# Altium PCB MiniRobot.PcbDoc
Units mm, origin at the board's own origin, x right, y up, seen from the top; angles counter-clockwise.
Board outline 90 x 85 mm, 2 copper layers (Top Layer, Bottom Layer); 51 components, 46 nets, 191 pads, 652 vias.
Unrouted connection lines stored in the file: 23.
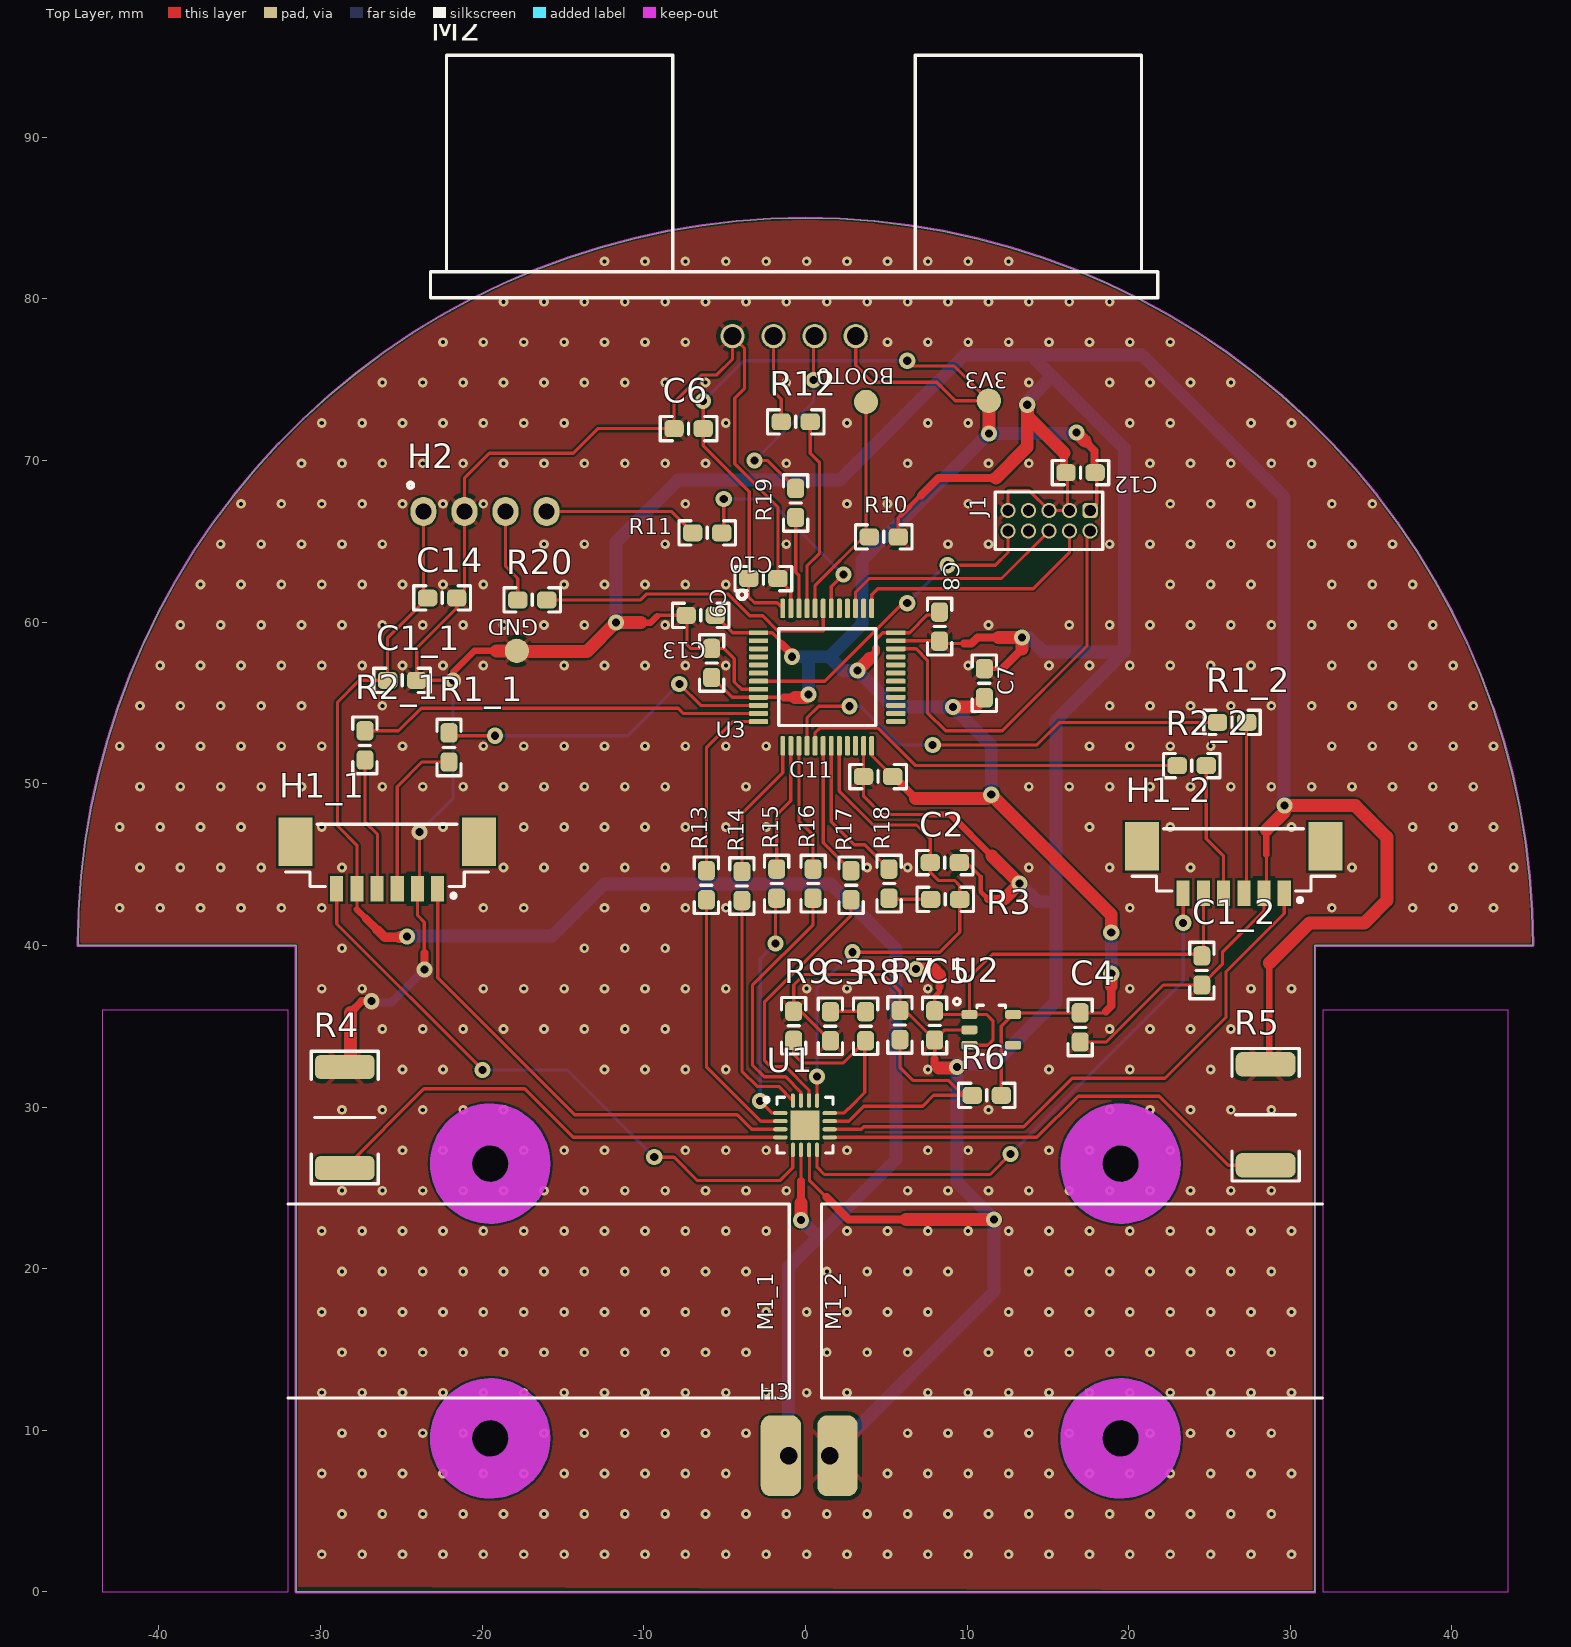
[diagram p0: Top Layer view]
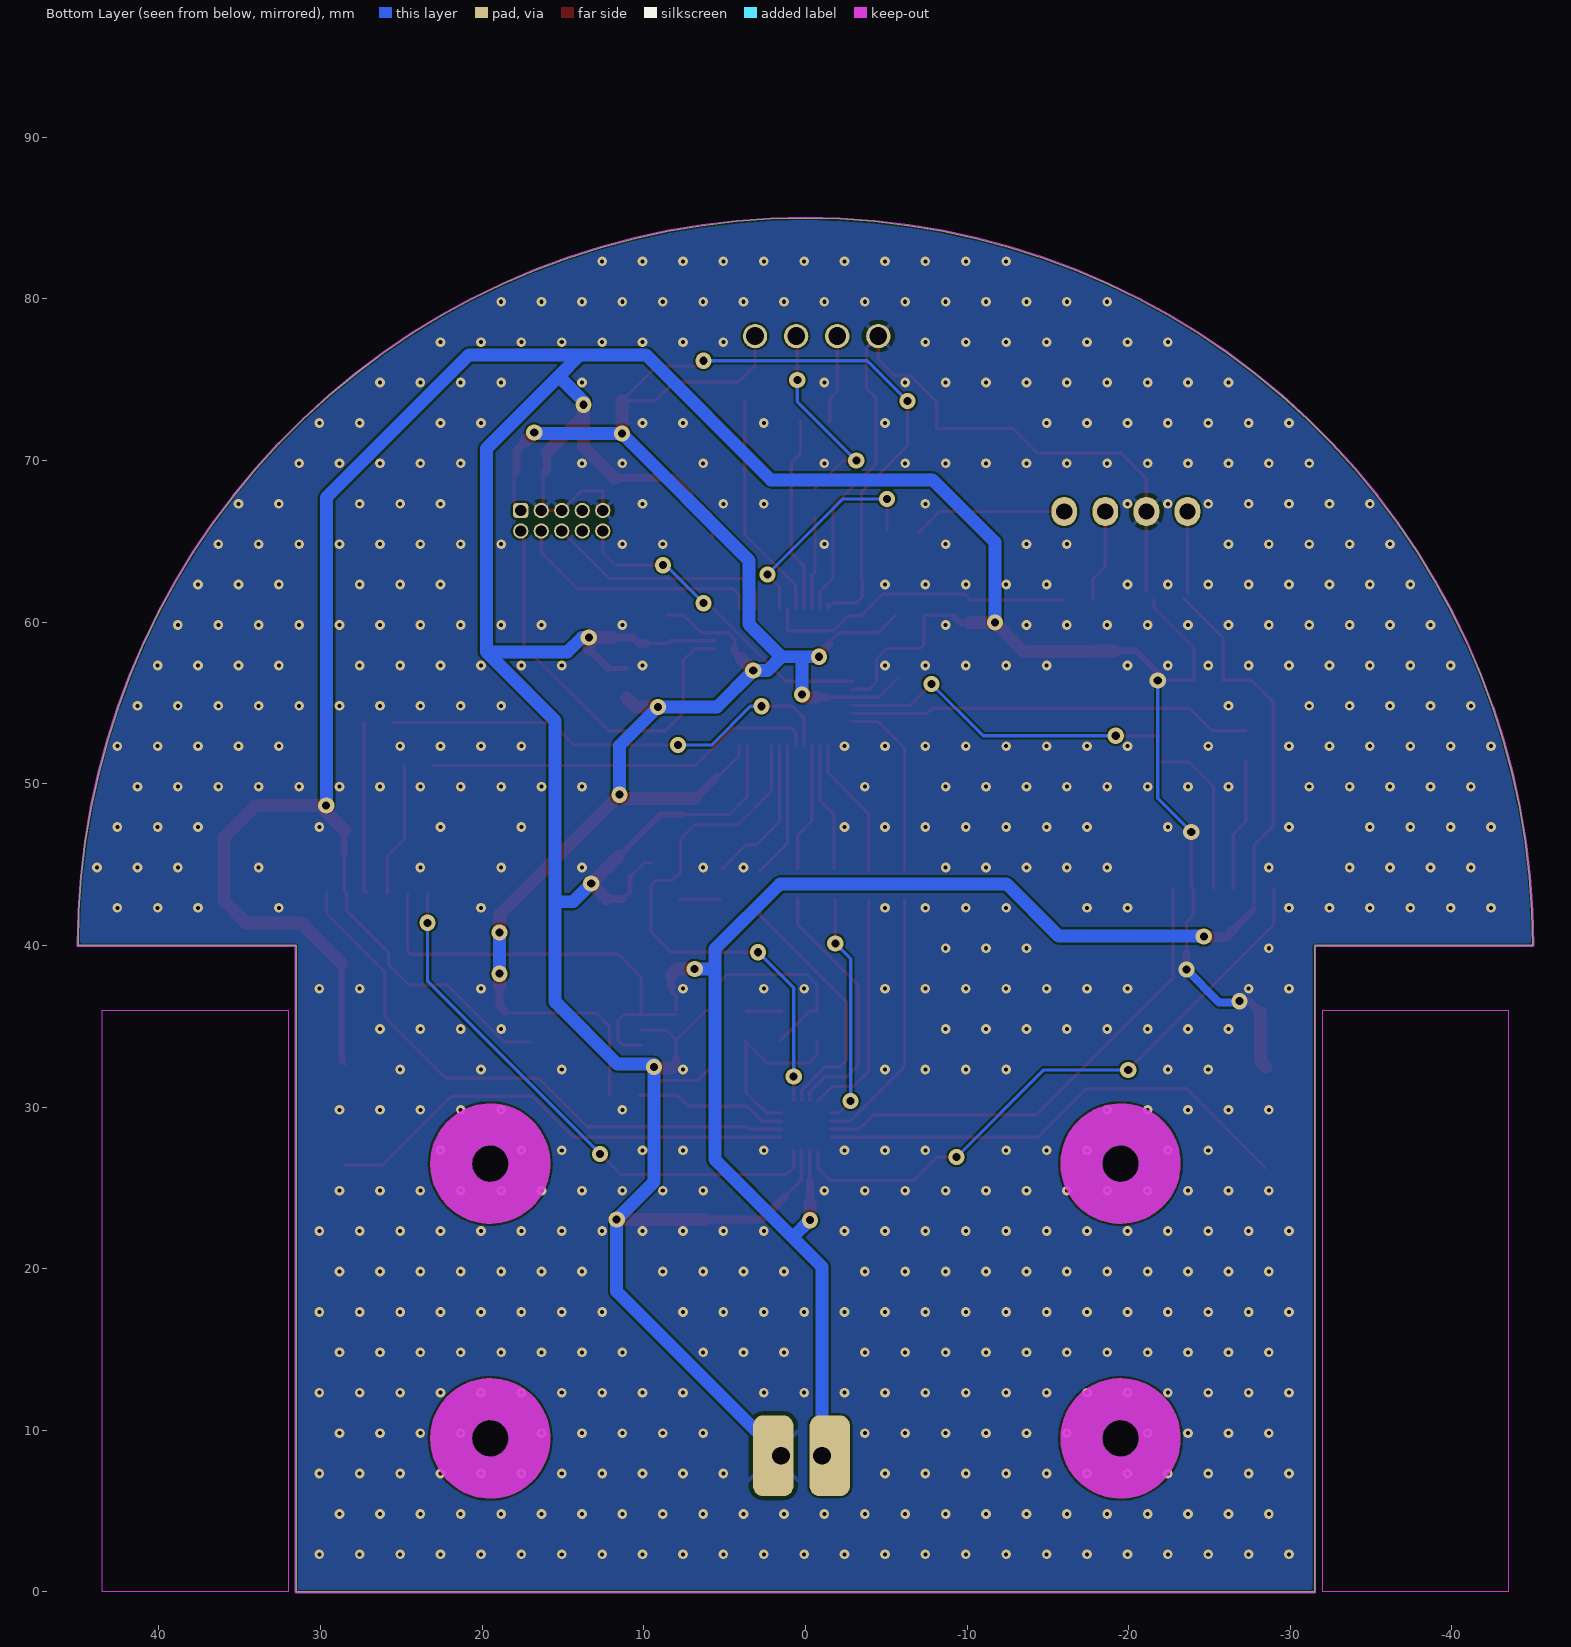
[diagram p1: Bottom Layer view, seen from below]

## Layer stack, top to bottom
Top Solder: solder mask 0.0102, Solder Resist, Dk 3.5
Top Layer: signal copper 0.0356
Dielectric 1: dielectric 0.32, FR-4, Dk 4.8
Bottom Layer: signal copper 0.0356
Bottom Solder: solder mask 0.0102, Solder Resist, Dk 3.5

## Board outline
45,40 44.949,42.141 44.796,44.278 44.542,46.404 44.187,48.516 43.732,50.609 43.177,52.678 42.525,54.718 41.777,56.725 40.933,58.694 39.998,60.62 38.971,62.5 37.856,64.329 36.656,66.103 35.372,67.817 34.009,69.469 32.568,71.054 31.054,72.568 29.469,74.009 27.817,75.372 26.103,76.656 24.329,77.856 22.5,78.971 20.62,79.998 18.694,80.933 16.725,81.777 14.718,82.525 12.678,83.177 10.609,83.732 8.516,84.187 6.404,84.542 4.278,84.796 2.141,84.949 0,85 -2.141,84.949 -4.278,84.796 -6.404,84.542 -8.516,84.187 -10.609,83.732 -12.678,83.177 -14.718,82.525 -16.725,81.777 -18.694,80.933 -20.62,79.998 -22.5,78.971 -24.329,77.856 -26.103,76.656 -27.817,75.372 -29.469,74.009 -31.054,72.568 -32.568,71.054 -34.009,69.469 -35.372,67.817 -36.656,66.103 -37.856,64.329 -38.971,62.5 -39.998,60.62 -40.933,58.694 -41.777,56.725 -42.525,54.718 -43.177,52.678 -43.732,50.609 -44.187,48.516 -44.542,46.404 -44.796,44.278 -44.949,42.141 -45,40 -31.5,40 -31.5,0 31.5,0 31.5,40

## Design rules (kind name [scope] priority, off if disabled: settings)
Clearance [All] p1: gap=0.125
ComponentClearance [All] p1 off: gap=0.254 collisioncheckmode=3 verticalgap=0.254 showdistances=FALSE
HoleSize [All] p1: absolutevalues=TRUE maxlimit=10 minlimit=0.19 maxpercent=80.000 minpercent=20.000
MinimumAnnularRing [All] p1: minimumring=0.076
MinimumSolderMaskSliver [All] p1: minsoldermaskwidth=0.154
PolygonConnect via_connect [IsVia] p1: connectstyle=Direct reliefconductorwidth=0.254 reliefentries=4 polygonreliefangle="90 Angle" airgapwidth=0.254
PolygonConnect [All] p2: connectstyle=Relief reliefconductorwidth=0.254 reliefentries=4 polygonreliefangle="45 Angle" airgapwidth=0.254
RoutingVias [All] p1: holewidth=0.25 width=0.6 viastyle="Through Hole" minholewidth=0.2 minwidth=0.45 maxholewidth=1 maxwidth=2
SilkToSilkClearance [All] p1: silktosilkclearance=0.154
SilkToSolderMaskClearance [IsPad] p1: minsilkscreentomaskgap=0 clearancetoexposedcopper=TRUE
SolderMaskExpansion SolderMask_Via [IsVia] p1: expansion=-100
SolderMaskExpansion [All] p2: expansion=0.102
Width [All] p1: maxlimit=10 minlimit=0.075 preferedwidth=0.2 minimp=50.000000 maximp=50.000000 favimp=50.000000
24 further rules are at their usual default settings.

## Classes and differential pairs
component class U_MR_UartConnector: C14 H2 R20
component class U_MR_RangeSensor: C6 M2 R12
component class U_MR_Motor_Control: C2 C3 R3 R4 R5 R6 R7 R8 R9 U1
component class U_MR_Mcu: 3V3 BOOT0 C7 C8 C9 C10 C11 C12 C13 GND J1 R10 R11 R13 R14 R15 R16 R17 R18 R19 U3
component class LeftMotor: C1_1 H1_1 M1_1 R1_1 R2_1
component class RightMotor: C1_2 H1_2 M1_2 R1_2 R2_2
component class U_MR_Power: C4 C5 H3 U2
channel class MR_Motor: LeftMotor RightMotor

## Components (designator, comment, footprint, x,y, rotation, side; value= is the part's Value field where it differs from the comment)
3V3 "TestPoint" ROUND_TEST_POINT 11.35,73.7 r270 top
BOOT0 "TestPoint" ROUND_TEST_POINT 3.75,73.625 r0 top
C1_1 "CerCap" 0603_CAP_LD -24.95,56.4 r180 top (schematic designator C1)
C1_2 "CerCap" 0603_CAP_LD 24.525,38.45 r90 top (schematic designator C1)
C2 "CerCap" 0603_CAP_LD 8.625,45.125 r180 top
C3 "CerCap" 0603_CAP_LD 1.55,35 r90 top
C4 "CerCap" 0603_CAP_LD 17,34.925 r90 top
C5 "CerCap" 0603_CAP_LD 8,35.05 r90 top
C6 "CerCap" 0603_CAP_LD -7.225,71.975 r0 top
C7 "CerCap" 0603_CAP_LD 11.075,56.225 r270 top
C8 "CerCap" 0603_CAP_LD 8.3,59.725 r90 top
C9 "CerCap" 0603_CAP_LD -5.8,57.475 r270 top
C10 "CerCap" 0603_CAP_LD -2.6,62.7 r180 top
C11 "CerCap" 0603_CAP_LD 4.5,50.45 r0 top
C12 "CerCap" 0603_CAP_LD 17.025,69.25 r0 top
C13 "CerCap" 0603_CAP_LD -6.475,60.425 r0 top
C14 "CerCap" 0603_CAP_LD -22.475,61.5 r180 top
GND "TestPoint" ROUND_TEST_POINT -17.85,58.225 r180 top
H1_1 "Header" HEADER_1X6_PICOBLADE_653106124022 -25.875,45.575 r180 top (schematic designator H1)
H1_2 "Header" HEADER_1X6_PICOBLADE_653106124022 26.5,45.3 r180 top (schematic designator H1)
H2 "Header" "HE14 1X4 STRAIGHT" -19.825,66.85 r0 top
H3 "CustomBatteryConnector" CUSTOMBATTERYCONNECTOR 0.238,8.423 r0 top
J1 "Debug" 62201021121 15.075,66.275 r180 top
M1_1 "MotorGroup" MOTORGROUP -1,18 r0 top locked (schematic designator M1)
M1_2 "MotorGroup" MOTORGROUP 1,18 r180 top locked (schematic designator M1)
M2 "Ultrasonic Range Sensor" HC-SR04 -0.7,77.7 r0 top
R1_1 "Resistor" 0603_RES_LD -22.05,52.25 r270 top (schematic designator R1)
R1_2 "Resistor" 0603_RES_LD 26.4,53.8 r0 top (schematic designator R1)
R2_1 "Resistor" 0603_RES_LD -27.25,52.375 r270 top (schematic designator R2)
R2_2 "Resistor" 0603_RES_LD 23.9,51.125 r0 top (schematic designator R2)
R3 "Resistor" 0603_RES_LD 8.65,42.85 r0 top
R4 "Resistor" 2512_RES_LD -28.5,29.35 r270 top
R5 "Resistor" 2512_RES_LD 28.475,29.525 r270 top
R6 "Resistor" 0603_RES_LD 11.225,30.725 r180 top
R7 "Resistor" 0603_RES_LD 5.85,35.075 r90 top
R8 "Resistor" 0603_RES_LD 3.725,35 r270 top
R9 "Resistor" 0603_RES_LD -0.725,35.025 r270 top
R10 "Resistor" 0603_RES_LD 4.85,65.275 r180 top
R11 "Resistor" 0603_RES_LD -6.075,65.525 r0 top
R12 "Resistor" 0603_RES_LD -0.6,72.4 r180 top
R13 "Resistor" 0603_RES_LD -6.125,43.725 r90 top
R14 "Resistor" 0603_RES_LD -3.925,43.675 r90 top
R15 "Resistor" 0603_RES_LD -1.775,43.825 r90 top
R16 "Resistor" 0603_RES_LD 0.475,43.825 r90 top
R17 "Resistor" 0603_RES_LD 2.825,43.725 r90 top
R18 "Resistor" 0603_RES_LD 5.175,43.825 r90 top
R19 "Resistor" 0603_RES_LD -0.6,67.375 r270 top
R20 "Resistor" 0603_RES_LD -16.9,61.375 r180 top
U1 "Dual Brush Motor Driver" QFN-STSPIN240 -0.025,28.875 r0 top
U2 "Low noise, Low Iq LDO" LP5907 11.5,34.775 r0 top
U3 "Microcontroller" STM32_LQFP48 1.35,56.6 r0 top

## Footprints (in the part's own frame and the unit in brackets; to place one, negate y for a bottom-side part, rotate by r counter-clockwise, add the part's x,y. Pads: shape width x height; smd on the part's side, far side on the other; paste and mask are expansions set on the pad)
0603_CAP_LD [mm] "0603 Capacitor Low Density"
  rrect50% 1.2x1.05 smd: 1(-0.9,0) 2(0.9,0)
  silkscreen extent -1.75,-0.75 1.75,0.75
0603_RES_LD [mm] "0603 Resistor Low Density"
  rrect50% 1.2x1.05 smd: 1(-0.9,0) 2(0.9,0)
  silkscreen extent -1.75,-0.75 1.75,0.75
2512_RES_LD [mm] "2512 Low Density Resistor"
  rrect50% 1.5x3.7 smd: 1(-3.125,0) 2(3.125,0)
  silkscreen extent -4.1,-2.07 4.1,2.07
62201021121 [mm] "Pin Header, pitch 1.27 mm, THT, Vertical, dual row, 10p"
  rrect50% 0.95x0.95 hole 0.7: 1(-2.54,-0.635)
  round 0.95 hole 0.7: 2(-2.54,0.635) 3(-1.27,-0.635) 4(-1.27,0.635) 5(0,-0.635) 6(0,0.635) 7(1.27,-0.635) 8(1.27,0.635) 9(2.54,-0.635) 10(2.54,0.635)
  silkscreen extent -3.32,-1.78 3.32,1.78, body extent -3.17,-1.7 3.18,1.7, height 5.33
CUSTOMBATTERYCONNECTOR [mm] "CustomBatteryConnector"
  rrect50% 2.5x5 smd paste-100: +(-1.75,0) -(1.75,0)
  rrect50% 2.5x5 smd far side paste-100: +(-1.75,0) -(1.75,0)
  round 1.5 hole 1.1 unplated paste-100: +(-1.27,0) -(1.27,0)
HC-SR04 [mm] "HC-SR04"
  round 1.5 hole 1.1 unplated: 1(-3.81,0) 2(-1.27,0) 3(1.27,0) 4(3.81,0)
  silkscreen extent -22.5,2.38 22.5,17.38, body extent -22.72,-0.3 22.72,17.49, height 20
"HE14 1X4 STRAIGHT" [mm] "Connector HE14 Straight 1x4"
  oval 1.6x1.8 hole 1 mask+0.102: 1(-3.81,0) 2(-1.27,0) 3(1.27,0) 4(3.81,0)
  silkscreen extent -4.77,1.47 -4.45,1.78, body extent -5.08,-1.27 5.08,1.27, height 9.5
HEADER_1X6_PICOBLADE_653106124022 [mm] "1.25mm SMT Male Vertical Shrouded Header, 6p"
  rect 0.81x1.6 smd: 1(-3.125,2.07) 2(-1.875,2.07) 3(-0.625,2.07) 4(0.625,2.07) 5(1.875,2.07) 6(3.125,2.07)
  rect 2.1x3 smd: ""(-5.675,-0.83) ""(5.675,-0.83)
  silkscreen extent -6.27,-1.92 6.27,2.62
LP5907 [mm] "LP5907 SOT23"
  rrect50% 1x0.55 smd mask+0.102: 1(-1.35,0.95) 2(-1.35,0) 3(-1.35,-0.95) 4(1.35,-0.95) 5(1.35,0.95)
  silkscreen extent -2.33,-1.52 0.88,1.95
MOTORGROUP [mm]
  round 0 hole 2.2 unplated paste+0 mask+0: 21(-18.5,8.5) 22(-18.5,-8.5)
  Keep-Out Layer circle w2.6: c-18.5,8.5 r2.425
  Keep-Out Layer circle w2.6: c-18.5,-8.5 r2.425
  Keep-Out Layer region: -31,-18 -31,18 -42.5,18 -42.5,-18
  silkscreen extent -31,-6 0,6
QFN-STSPIN240 [mm] "QFN, 16-Leads, Body 3,00x3,00mm, Pitch 0,50mm, Thermal Pad 1,80x1,80mm, IPC Low Density"
  oval 0.9x0.25 smd: 1(-1.525,0.75) 2(-1.525,0.25) 3(-1.525,-0.25) 4(-1.525,-0.75) 9(1.525,-0.75) 10(1.525,-0.25) 11(1.525,0.25) 12(1.525,0.75)
  oval 0.25x0.9 smd: 5(-0.75,-1.525) 6(-0.25,-1.525) 7(0.25,-1.525) 8(0.75,-1.525) 13(0.75,1.525) 14(0.25,1.525) 15(-0.25,1.525) 16(-0.75,1.525)
  rect 1.8x1.8 smd: 7(0,0)
  silkscreen extent -2.5,-1.73 1.73,1.73
ROUND_TEST_POINT [mm] "Small round test point"
  round 1.5 smd paste-100: 1(0,0)
STM32_LQFP48 [mm]
  rrect50% 1.2x0.3 smd: 1(-4.25,2.75) 2(-4.25,2.25) 3(-4.25,1.75) 4(-4.25,1.25) 5(-4.25,0.75) 6(-4.25,0.25) 7(-4.25,-0.25) 8(-4.25,-0.75) 9(-4.25,-1.25) 10(-4.25,-1.75) 11(-4.25,-2.25) 12(-4.25,-2.75) 25(4.25,-2.75) 26(4.25,-2.25) 27(4.25,-1.75) 28(4.25,-1.25) 29(4.25,-0.75) 30(4.25,-0.25) 31(4.25,0.25) 32(4.25,0.75) 33(4.25,1.25) 34(4.25,1.75) 35(4.25,2.25) 36(4.25,2.75)
  rrect50% 0.3x1.2 smd: 13(-2.75,-4.25) 14(-2.25,-4.25) 15(-1.75,-4.25) 16(-1.25,-4.25) 17(-0.75,-4.25) 18(-0.25,-4.25) 19(0.25,-4.25) 20(0.75,-4.25) 21(1.25,-4.25) 22(1.75,-4.25) 23(2.25,-4.25) 24(2.75,-4.25) 37(2.75,4.25) 38(2.25,4.25) 39(1.75,4.25) 40(1.25,4.25) 41(0.75,4.25) 42(0.25,4.25) 43(-0.25,4.25) 44(-0.75,4.25) 45(-1.25,4.25) 46(-1.75,4.25) 47(-2.25,4.25) 48(-2.75,4.25)
  silkscreen extent -5.54,-3 3,5.37

## Part data
C1_1 C1_2 C2 C3 C4 C5 C6 C7 C8 C9 C10 C11 C12 C13 C14: "Ceramic Capacitor"
H1_1 H1_2: library part Header_6x1, "Header 6x1 Pins"
H2: library part Header_4x1, "Header 4x1 PIns"
H3: library part BatteryConnector, "Custom Battery Connector"
J1: library part Cortex_10x2, "Cortex 10 pins Debug Connector"
M1_1 M1_2: library part Motor
M2: library part HC-SR04
U1: library part STSPIN240, "ST Dual Motor Driver"
U2: library part LP5907, "LP5907 Low Noise Low Iq LDO"
U3: library part STM32F303CBT6, "STM32F303 Microcontroller"

## Via types
v1: diameter 0.6, hole 0.25, Top Layer to Bottom Layer, 609 vias
v2: diameter 1, hole 0.5, Top Layer to Bottom Layer, 43 vias

## Nets (pads, with @x,y where several pads share a name; then routed paths per layer and width w, separated by ;. In a path a pad name is that pad's centre, name@x,y a point inside that pad or via, vN(x,y) a via of type N, cw(c..) or ccw(c..) an arc to the next point about the centre after c; other vN are vias at no path point)
3V3: 3V3.1 C4.2 C6.2 C7.2 C8.2 C9.2 C10.2 C11.2 C12.2 C13.2 J1.1 M2.4 R6.1 U2.5 U3.1 U3.9 U3.24 U3.36 U3.48 | length 155.8
  Top Layer w0.2: v2(-6.325,73.675) C6.2 -6.325,70.925 -3.475,68.075 -3.475,62.725 C10.2 -3.525,62.675 -3.525,61.575 -3.15,61.2 -1.75,61.2 U3.48 U3.48@-1.4,61.175 ; C9.2@-5.75,56.575 -4.525,55.35 U3.9 -1.325,55.35 ; C13.2 -4.5,59.35 U3.1 -2.06,59.35 -1.475,58.765 -1.475,58.65 ; M2.4 3.11,75.89 4.15,74.85 8.125,74.85 9.275,73.7 3V3.1 9.2,75.85 6.625,75.85 v2(6.3,76.175) ; U3.24 4.1,51.75 C11.2 C11.2@5.475,50.45 ; 4.375,58.375 4.375,58.95 4.775,59.35 U3.36 6.45,59.35 7.55,60.45 C8.2@8.6,60.45 ; R6.1 12.125,35 U2.5 ; U2.5@12.95,35.825 C4.2 18.5,35.825 18.6,35.925 ; J1.1 18.025,67.32 C12.2@18.025,69.35
  Top Layer w0.5: -1.475,58.65 v2@-0.837,58.013 ; -1.325,55.35 -0.65,55.35 ; 3.975,57.75 4.375,58.15 4.375,58.375 ; C11.2@5.475,50.45 6.825,49.1 ; 17.3,71.2 17.875,70.625 17.875,69.3 C12.2 ; 18.6,35.925 18.925,36.25 18.925,37.5
  Top Layer w0.8: v2(-0.837,57.863) v2@-0.837,58.013 ; -0.65,55.35 0.025,55.35 v2(0.2,55.525) ; v2(3.225,57) 3.975,57.75 ; 6.825,49.1 v2@11.275,49.1 ; v2(9.125,54.75) 10.5,54.75 C7.2 ; v2(11.35,71.675) 3V3.1 ; v2(11.5,49.325) 18.925,41.9 v2(18.925,40.8) ; v2(16.775,71.725) 17.3,71.2 ; 18.925,37.5 v2(18.925,38.25)
  Bottom Layer w0.2: v2(-6.325,73.675) -3.825,76.175 v2(6.3,76.175)
  Bottom Layer w0.8: v2(-0.837,57.863) 0.45,57.863 ; v2(0.2,55.525) 0.2,57.613 0.45,57.863 ; v2(11.5,49.325) 11.5,52.375 v2(9.125,54.75) 5.475,54.75 v2(3.225,57) 2.35,57 1.488,57.863 ; v2(16.775,71.725) 16.725,71.675 v2(11.35,71.675) 3.5,63.825 3.5,59.875 1.488,57.863 ; v2@18.925,38.625 v2(18.925,40.8) ; 0.45,57.863 1.488,57.863
BOOT0: BOOT0.1 R10.2 U3.44 | length 14.1
  Top Layer w0.2: U3.44 0.6,62.275 3.75,65.425 BOOT0.1
GND: C1_1.1 C1_2.1 C2.1 C3.1 C4.1 C5.1 C6.1 C7.1 C8.1 C9.1 C10.1 C11.1 C12.1 C13.1 C14.1 GND.1 H1_1.2 H1_2.2 H2.2 H3.- J1.3 J1.5 J1.9 M2.1 R4.1 R5.1 R7.2 R9.1 R10.1 U1.7 U2.2 U3.8 U3.23 U3.35 U3.47 | length 417.9
  Top Layer w0.2: H1_1.2 -24,41.865 -23.575,41.44 -23.575,39.525 ; H1_1.2@-23.875,43.63 v2(-23.875,47.025) ; v2(-21.8,56.4) C1_1.1 -24.05,58.4 -21.575,60.875 C14.1 ; C14.1@-21.095,61.98 H2.2 -21.095,68.905 -19.55,70.45 -14.375,70.45 -12.85,71.975 C6.1 -8.125,73.6 -6.425,75.3 -5.475,75.3 -4.51,76.265 M2.1 -3.775,76.965 -3.775,74.45 -4.375,73.85 -4.375,69.8 -1.7,67.125 C10.1 -0.9,61.9 U3.47 ; -9.175,60.375 -9.125,60.425 C13.1 ; C13.1@-7.325,60.375 -7.325,58.6 -7.1,58.375 C9.1 -5.05,58.375 -4.4,57.725 -4.4,56.3 -3.95,55.85 U3.8 ; U1.7@0.225,27.35 0.25,27.325 0.25,25.475 1.3,24.425 ; C3.1 -0.275,35.925 R9.1 -0.725,37.55 -0.075,38.2 4.825,38.2 5.85,37.175 R7.2 6.175,35.975 C5.1 ; U3.23 C11.1 3.6,49.225 4.725,48.1 7.675,48.1 ; U3.35 C8.1@8.4,58.85 ; R10.1 5.75,66.45 5.9,66.6 ; 8,32.975 C5.1 ; C8.1 8.45,58.675 9.825,58.675 ; C2.1 9.975,45.125 10.85,44.25 ; U2.2 8.625,34.775 C5.1 ; J1.9 12.535,68.135 13.85,68.135 J1.5 J1.3 ; J1.3@16.225,67.03 C12.1@16.225,69.35 ; C4.1 18.625,34.025 22.15,37.55 C1_2.1 25.8,38.825 25.8,39.575 28.375,42.15 H1_2.2 28.525,43.38 28.525,45.6 ; R5.1 R5.1@28.7,32.875
  Top Layer w0.3: 5.9,66.6 7.15,67.85 ; 10.85,44.25 10.85,43.325 11.3,42.875 ; C7.1 12.175,57.125 12.25,57.2
  Top Layer w0.4: v2@-21.8,56.9 -20.475,58.225 -19.125,58.225 ; -10.175,59.975 -9.575,59.975 -9.175,60.375 ; 7.675,48.1 8.975,48.1 11.55,45.525 ; 28.525,45.6 28.525,47.15 ; R5.1@28.7,32.875 28.7,38.9
  Top Layer w0.5: -28.15,35.85 -27.45,36.55 v2(-26.85,36.55) ; v2(-23.575,38.5) -23.575,39.525 ; 1.3,24.425 2.675,23.05 6.225,23.05 ; 7.15,67.85 8.225,68.925 11.8,68.925 ; 8,32.975 8,32.675 8.25,32.425 ; 9.825,58.675 10.275,58.675 10.65,59.05 11.95,59.05 ; 11.3,42.875 12.3,42.875 ; 12.25,57.2 13.4,58.35 ; 16,70.475 16,69.375 C12.1
  Top Layer w0.8: R4.1 -28.15,32.825 -28.15,35.85 ; -19.125,58.225 GND.1 ; GND.1@-17.475,58.175 -13.525,58.175 v2(-11.725,59.975) -10.175,59.975 ; 6.225,23.05 v2(11.675,23.05) ; 8.25,32.425 9.325,32.425 v2(9.375,32.475) ; 11.55,45.525 v2(13.25,43.825) 12.3,42.875 ; 11.8,68.925 13.725,70.85 v2(13.725,73.45) 13.75,73.425 13.75,72.725 16,70.475 ; 11.95,59.05 v2(13.4,59.05) 13.4,58.35 ; 28.525,47.15 29.65,48.275 v2(29.65,48.65) 34.025,48.65 35.975,46.7 35.975,42.775 34.6,41.4 31.2,41.4 28.7,38.9
  Bottom Layer w0.2: v2(-23.875,47.025) -21.8,49.1 v2(-21.8,56.4)
  Bottom Layer w0.5: v2(-26.85,36.55) -26.775,36.475 -25.6,36.475 v2(-23.575,38.5)
  Bottom Layer w0.8: v2(-11.725,59.975) -11.725,64.95 -7.875,68.8 2.125,68.8 9.85,76.525 13.95,76.525 ; H3.-@1.508,8.423 11.675,18.59 v2(11.675,23.05) 9.375,25.35 v2(9.375,32.475) 9.375,32.65 11.625,32.65 15.45,36.475 ; v2(13.25,43.825) 14.375,42.7 15.5,42.7 ; v2(13.4,59.05) 13.825,59.05 14.712,58.162 19.737,58.162 ; v2(13.725,73.45) 13.725,73.675 15.262,75.213 ; 15.5,36.525 15.5,42.7 ; v2@29.625,48.65 29.625,67.725 20.825,76.525 13.95,76.525 ; 13.95,76.525 15.262,75.213 ; 15.262,75.213 19.737,70.738 19.737,58.162 ; 15.5,42.7 15.5,53.925 19.737,58.162
  other v1: -29.925,2.325 -27.425,2.325 -24.925,2.325 -22.425,2.325 -19.925,2.325 -17.425,2.325 -14.925,2.325 -12.425,2.325 -9.925,2.325 -7.425,2.325 -4.925,2.325 -2.425,2.325 0.075,2.325 2.575,2.325 5.075,2.325 7.575,2.325 10.075,2.325 12.575,2.325 15.075,2.325 17.575,2.325 20.075,2.325 22.575,2.325 25.075,2.325 27.575,2.325 30.075,2.325 -28.675,4.825 -26.175,4.825 -23.675,4.825 -21.175,4.825 -18.675,4.825 -16.175,4.825 -13.675,4.825 -11.175,4.825 -8.675,4.825 -6.175,4.825 -3.675,4.825 -1.175,4.825 1.325,4.825 3.825,4.825 6.325,4.825 8.825,4.825 11.325,4.825 13.825,4.825 16.325,4.825 18.825,4.825 21.325,4.825 23.825,4.825 26.325,4.825 28.825,4.825 -29.925,7.325 -27.425,7.325 -24.925,7.325 -22.425,7.325 -19.925,7.325 -17.425,7.325 -14.925,7.325 -12.425,7.325 -9.925,7.325 -7.425,7.325 -4.925,7.325 5.075,7.325 7.575,7.325 10.075,7.325 12.575,7.325 15.075,7.325 17.575,7.325 20.075,7.325 22.575,7.325 25.075,7.325 27.575,7.325 30.075,7.325 -28.675,9.825 -26.175,9.825 -23.675,9.825 -21.175,9.825 -16.175,9.825 -13.675,9.825 -11.175,9.825 -8.675,9.825 -6.175,9.825 -3.675,9.825 6.325,9.825 8.825,9.825 11.325,9.825 13.825,9.825 16.325,9.825 21.325,9.825 23.825,9.825 26.325,9.825 28.825,9.825 -29.925,12.325 -27.425,12.325 -24.925,12.325 -22.425,12.325 -19.925,12.325 -17.425,12.325 -14.925,12.325 -12.425,12.325 -9.925,12.325 -7.425,12.325 -4.925,12.325 -2.425,12.325 0.075,12.325 2.575,12.325 7.575,12.325 10.075,12.325 12.575,12.325 15.075,12.325 17.575,12.325 20.075,12.325 22.575,12.325 25.075,12.325 27.575,12.325 30.075,12.325 -28.675,14.825 -26.175,14.825 -23.675,14.825 -21.175,14.825 -18.675,14.825 -16.175,14.825 -13.675,14.825 -11.175,14.825 -8.675,14.825 -6.175,14.825 -3.675,14.825 1.325,14.825 3.825,14.825 6.325,14.825 11.325,14.825 13.825,14.825 16.325,14.825 18.825,14.825 21.325,14.825 23.825,14.825 26.325,14.825 28.825,14.825 -29.925,17.325 -27.425,17.325 -24.925,17.325 -22.425,17.325 -19.925,17.325 -17.425,17.325 -14.925,17.325 -12.425,17.325 -9.925,17.325 -7.425,17.325 -4.925,17.325 -2.425,17.325 0.075,17.325 2.575,17.325 5.075,17.325 7.575,17.325 12.575,17.325 15.075,17.325 17.575,17.325 20.075,17.325 22.575,17.325 25.075,17.325 27.575,17.325 30.075,17.325 -28.675,19.825 -26.175,19.825 -23.675,19.825 -21.175,19.825 -18.675,19.825 -16.175,19.825 -13.675,19.825 -11.175,19.825 -8.675,19.825 -6.175,19.825 -3.675,19.825 1.325,19.825 3.825,19.825 6.325,19.825 8.825,19.825 13.825,19.825 16.325,19.825 18.825,19.825 21.325,19.825 23.825,19.825 26.325,19.825 28.825,19.825 -29.925,22.325 -27.425,22.325 -24.925,22.325 -22.425,22.325 -19.925,22.325 -17.425,22.325 -14.925,22.325 -12.425,22.325 -9.925,22.325 -7.425,22.325 -4.925,22.325 -2.425,22.325 2.575,22.325 5.075,22.325 7.575,22.325 10.075,22.325 12.575,22.325 15.075,22.325 17.575,22.325 20.075,22.325 22.575,22.325 25.075,22.325 27.575,22.325 30.075,22.325 -28.675,24.825 -26.175,24.825 -23.675,24.825 -21.175,24.825 -18.675,24.825 -16.175,24.825 -13.675,24.825 -11.175,24.825 -8.675,24.825 -6.175,24.825 -3.675,24.825 -1.175,24.825 6.325,24.825 8.825,24.825 11.325,24.825 13.825,24.825 16.325,24.825 18.825,24.825 21.325,24.825 23.825,24.825 26.325,24.825 28.825,24.825 -24.925,27.325 -22.425,27.325 -17.425,27.325 -14.925,27.325 -12.425,27.325 -7.425,27.325 -4.925,27.325 -2.425,27.325 2.575,27.325 7.575,27.325 10.075,27.325 15.075,27.325 17.575,27.325 22.575,27.325 -28.675,29.825 -26.175,29.825 -23.675,29.825 -21.175,29.825 -18.675,29.825 11.325,29.825 18.825,29.825 21.325,29.825 23.825,29.825 26.325,29.825 28.825,29.825 -24.925,32.325 -22.425,32.325 -12.425,32.325 -9.925,32.325 -7.425,32.325 -4.925,32.325 7.575,32.325 15.075,32.325 20.075,32.325 25.075,32.325 -26.175,34.825 -23.675,34.825 -21.175,34.825 -18.675,34.825 -16.175,34.825 -13.675,34.825 -11.175,34.825 -8.675,34.825 18.825,34.825 21.325,34.825 23.825,34.825 26.325,34.825 -29.925,37.325 -27.425,37.325 -19.925,37.325 -17.425,37.325 -14.925,37.325 -12.425,37.325 -9.925,37.325 -7.425,37.325 -4.925,37.325 0.075,37.325 2.575,37.325 7.575,37.325 20.075,37.325 27.575,37.325 30.075,37.325 -28.675,39.825 -13.675,39.825 -11.175,39.825 -8.675,39.825 -42.425,42.325 -39.925,42.325 -37.425,42.325 -34.925,42.325 -32.425,42.325 -29.925,42.325 -19.925,42.325 -17.425,42.325 -12.425,42.325 -9.925,42.325 -7.425,42.325 -4.925,42.325 20.075,42.325 32.575,42.325 37.575,42.325 40.075,42.325 42.575,42.325 -41.175,44.825 -38.675,44.825 -36.175,44.825 -33.675,44.825 -28.675,44.825 -18.675,44.825 -16.175,44.825 -13.675,44.825 -11.175,44.825 -8.675,44.825 3.825,44.825 6.325,44.825 13.825,44.825 18.825,44.825 23.825,44.825 33.825,44.825 38.825,44.825 41.325,44.825 43.825,44.825 -42.425,47.325 -39.925,47.325 -37.425,47.325 -34.925,47.325 -29.925,47.325 -22.425,47.325 -17.425,47.325 -14.925,47.325 -12.425,47.325 -9.925,47.325 -7.425,47.325 -4.925,47.325 -2.425,47.325 17.575,47.325 22.575,47.325 30.075,47.325 37.575,47.325 40.075,47.325 42.575,47.325 -41.175,49.825 -38.675,49.825 -36.175,49.825 -33.675,49.825 -31.175,49.825 -26.175,49.825 -23.675,49.825 -21.175,49.825 -18.675,49.825 -16.175,49.825 -13.675,49.825 -11.175,49.825 -8.675,49.825 -3.675,49.825 13.825,49.825 16.325,49.825 18.825,49.825 21.325,49.825 23.825,49.825 26.325,49.825 28.825,49.825 31.325,49.825 33.825,49.825 36.325,49.825 38.825,49.825 41.325,49.825 -42.425,52.325 -39.925,52.325 -37.425,52.325 -34.925,52.325 -32.425,52.325 -29.925,52.325 -24.925,52.325 -19.925,52.325 -17.425,52.325 -14.925,52.325 -12.425,52.325 -9.925,52.325 -7.425,52.325 -4.925,52.325 -2.425,52.325 17.575,52.325 20.075,52.325 22.575,52.325 25.075,52.325 32.575,52.325 35.075,52.325 37.575,52.325 40.075,52.325 42.575,52.325 -41.175,54.825 -38.675,54.825 -36.175,54.825 -33.675,54.825 -31.175,54.825 -26.175,54.825 18.825,54.825 21.325,54.825 23.825,54.825 26.325,54.825 28.825,54.825 31.325,54.825 33.825,54.825 36.325,54.825 38.825,54.825 41.325,54.825 -39.925,57.325 -37.425,57.325 -34.925,57.325 -32.425,57.325 -29.925,57.325 -27.425,57.325 -24.925,57.325 -22.425,57.325 -19.925,57.325 -14.925,57.325 -12.425,57.325 -9.925,57.325 -7.425,57.325 -4.925,57.325 10.075,57.325 15.075,57.325 17.575,57.325 20.075,57.325 22.575,57.325 25.075,57.325 27.575,57.325 32.575,57.325 35.075,57.325 37.575,57.325 40.075,57.325 -38.675,59.825 -36.175,59.825 -33.675,59.825 -31.175,59.825 -28.675,59.825 -26.175,59.825 -23.675,59.825 -21.175,59.825 -18.675,59.825 -16.175,59.825 -13.675,59.825 -8.675,59.825 11.325,59.825 16.325,59.825 18.825,59.825 21.325,59.825 23.825,59.825 26.325,59.825 28.825,59.825 31.325,59.825 33.825,59.825 36.325,59.825 38.825,59.825 -37.425,62.325 -34.925,62.325 -32.425,62.325 -29.925,62.325 -27.425,62.325 -24.925,62.325 -22.425,62.325 -19.925,62.325 -14.925,62.325 -12.425,62.325 -9.925,62.325 -7.425,62.325 -4.925,62.325 22.575,62.325 25.075,62.325 27.575,62.325 32.575,62.325 35.075,62.325 37.575,62.325 -36.175,64.825 -33.675,64.825 -31.175,64.825 -28.675,64.825 -26.175,64.825 -16.175,64.825 -13.675,64.825 -8.675,64.825 -1.175,64.825 8.825,64.825 11.325,64.825 18.825,64.825 21.325,64.825 23.825,64.825 26.325,64.825 28.825,64.825 31.325,64.825 33.825,64.825 36.325,64.825 -34.925,67.325 -32.425,67.325 -29.925,67.325 -27.425,67.325 -24.925,67.325 -22.425,67.325 -19.925,67.325 -7.425,67.325 2.575,67.325 5.075,67.325 10.075,67.325 22.575,67.325 25.075,67.325 27.575,67.325 32.575,67.325 35.075,67.325 -31.175,69.825 -28.675,69.825 -26.175,69.825 -23.675,69.825 -21.175,69.825 -18.675,69.825 -16.175,69.825 -13.675,69.825 -11.175,69.825 -8.675,69.825 -6.175,69.825 -1.175,69.825 6.325,69.825 11.325,69.825 13.825,69.825 21.325,69.825 23.825,69.825 26.325,69.825 28.825,69.825 31.325,69.825 -29.925,72.325 -27.425,72.325 -24.925,72.325 -22.425,72.325 -19.925,72.325 -17.425,72.325 -14.925,72.325 -4.925,72.325 2.575,72.325 7.575,72.325 10.075,72.325 20.075,72.325 22.575,72.325 27.575,72.325 30.075,72.325 -26.175,74.825 -23.675,74.825 -21.175,74.825 -18.675,74.825 -16.175,74.825 -13.675,74.825 -11.175,74.825 -8.675,74.825 -6.175,74.825 -1.175,74.825 13.825,74.825 18.825,74.825 21.325,74.825 23.825,74.825 26.325,74.825 -22.425,77.325 -19.925,77.325 -17.425,77.325 -14.925,77.325 -12.425,77.325 -9.925,77.325 -7.425,77.325 5.075,77.325 7.575,77.325 10.075,77.325 12.575,77.325 15.075,77.325 17.575,77.325 20.075,77.325 22.575,77.325 -18.675,79.825 -16.175,79.825 -13.675,79.825 -11.175,79.825 -8.675,79.825 -6.175,79.825 -3.675,79.825 -1.175,79.825 1.325,79.825 3.825,79.825 6.325,79.825 8.825,79.825 11.325,79.825 13.825,79.825 16.325,79.825 18.825,79.825 -12.425,82.325 -9.925,82.325 -7.425,82.325 -4.925,82.325 -2.425,82.325 0.075,82.325 2.575,82.325 5.075,82.325 7.575,82.325 10.075,82.325 12.575,82.325
NetC2_2: C2.2 R3.2 U1.13 U3.20 | length 34
  Top Layer w0.2: U1.13 v2(0.725,31.9) ; U3.20 2.1,49.55 4.2,47.45 6.875,47.45 7.725,46.6 C2.2 7.725,44.525 8.225,44.025 9.225,44.025 9.55,43.7 R3.2 9.55,40.825 8.3,39.575 v2(2.925,39.575)
  Bottom Layer w0.2: v2(0.725,31.9) 0.725,37.375 v2(2.925,39.575)
NetC3_2: C3.2 R8.1 | length 2.2
  Top Layer w0.2: C3.2@1.45,35.925 R8.1@3.675,35.925
NetH1_1_1: H1_1.1 U1.3 | length 30.6
  Top Layer w0.2: H1_1.1 -22.75,38 -14.275,29.525 -4.225,29.525 -3.325,28.625 U1.3
NetH1_1_3: H1_1.3 R1_1.2 | length 10.2
  Top Layer w0.2: H1_1.3 -25.25,49.825 -23.725,51.35 R1_1.2
NetH1_1_4: H1_1.4 R2_1.2 | length 8.3
  Top Layer w0.2: R2_1.2 -27.25,47.65 -26.475,46.875 H1_1.4@-26.475,43.53
NetH1_1_6: H1_1.6 U1.5 | length 38.4
  Top Layer w0.2: H1_1.6 -29,41.325 v2(-19.975,32.3) ; v2(-9.35,26.9) -8.125,26.9 -6.675,25.45 -1.575,25.45 -0.775,26.25 U1.5
  Bottom Layer w0.2: v2(-19.975,32.3) -14.75,32.3 v2(-9.35,26.9)
NetH1_2_1: H1_2.1 U1.10 | length 36.6
  Top Layer w0.2: U1.10 3.45,28.625 3.6,28.775 13.5,28.775 16.5,31.775 22.25,31.775 26.025,35.55 26.025,38.375 29.625,41.975 H1_2.1
NetH1_2_3: H1_2.3 R1_2.2 | length 10.6
  Top Layer w0.2: H1_2.3 27.3,43.405 R1_2.2
NetH1_2_4: H1_2.4 R2_2.2 | length 8.3
  Top Layer w0.2: R2_2.2 24.8,46.6 25.875,45.525 H1_2.4
NetH1_2_6: H1_2.6 U1.8 | length 34.3
  Top Layer w0.2: U1.8 0.725,26.275 1.175,25.825 11.425,25.825 v2(12.7,27.1) ; v2(23.375,41.4) H1_2.6
  Bottom Layer w0.2: v2(12.7,27.1) 23.375,37.775 v2(23.375,41.4)
NetH2_3: H2.3 R20.2 | length 5.8
  Top Layer w0.2: H2.3 -18.555,63.455 -17.8,62.7 R20.2
NetH2_4: H2.4 R11.1 | length 9.6
  Top Layer w0.2: H2.4 -8.3,66.85 R11.1
NetM2_2: M2.2 R12.2 | length 5.5
  Top Layer w0.2: M2.2 -1.97,74.27 -1.5,73.8 R12.2
NetM2_3: M2.3 R19.1 | length 12.5
  Top Layer w0.2: v2(-3.15,70) -2.325,70 R19.1 ; v2(0.5,74.975) 0.5,77.63 M2.3
  Bottom Layer w0.2: v2(-3.15,70) 0.5,73.65 v2(0.5,74.975)
NetR1_1_1: R1_1.1 U3.10 | length 20.8
  Top Layer w0.2: R1_1.1@-21.875,52.975 v2(-19.2,52.975) ; v2(-7.8,56.175) -6.475,54.85 U3.10
  Bottom Layer w0.2: v2(-19.2,52.975) -11,52.975 v2(-7.8,56.175)
NetR1_2_1: R1_2.1 U3.16 | length 29
  Top Layer w0.2: U3.16 0.1,54.075 0.825,54.8 v2(2.725,54.8) ; v2(7.875,52.4) 14.325,52.4 15.725,53.8 R1_2.1
  Bottom Layer w0.2: v2(2.725,54.8) 3.4,54.8 5.8,52.4 v2(7.875,52.4)
NetR2_1_1: R2_1.1 U3.11 | length 25.1
  Top Layer w0.2: R2_1.1 -25.175,53.275 -23.775,54.675 -7.875,54.675 -7.55,54.35 U3.11
NetR2_2_1: R2_2.1 U3.17 | length 24.3
  Top Layer w0.2: U3.17 0.6,53.175 0.875,53.45 4.5,53.45 6.825,51.125 R2_2.1
NetR3_1: R3.1 R18.1 | length 2.5
  Top Layer w0.2: R18.1@5.25,42.85 R3.1
NetR4_2: R4.2 U1.4 | length 30.2
  Top Layer w0.2: R4.2 -23.6,31.125 -17.375,31.125 -14.375,28.125 U1.4
NetR5_2: R5.2 U1.9 | length 29.8
  Top Layer w0.2: U1.9 14.325,28.125 16.875,30.675 21.9,30.675 26.175,26.4 R5.2
NetR6_2: R6.2 R7.1 U1.11 | length 15.9
  Top Layer w0.2: U1.11 2.675,29.125 3.6,30.05 7.25,30.05 7.925,30.725 R6.2@9.775,30.725 ; R7.1 5.85,32.45 6.65,31.65 8.85,31.65 R6.2@9.775,30.725 ; R6.2 R6.2@9.775,30.725
NetR8_2: R8.2 R9.2 U1.12 | length 12
  Top Layer w0.2: R9.2 -0.725,33.25 -0.2,32.725 2.35,32.725 R8.2@3.675,34.05 ; U1.12 2.365,29.625 2.64,29.9 2.675,29.9 3.675,30.9 R8.2@3.675,34.05 ; R8.2 R8.2@3.675,34.05
NetR11_2: R11.2 U3.42 | length 13.7
  Top Layer w0.2: R11.2@-5.05,65.65 v2(-5.05,67.625) ; U3.42 1.6,62.2 v2(2.35,62.95)
  Bottom Layer w0.2: v2(-5.05,67.625) -2.325,67.625 v2(2.35,62.95)
NetR12_1: R12.1 U3.45 | length 12.1
  Top Layer w0.2: U3.45 0.1,63.5 0.875,64.275 0.875,69.875 0.3,70.45 R12.1
NetR13_1: R13.1 U1.2 | length 16.3
  Top Layer w0.2: R13.1 -6.125,32.5 -2.75,29.125 U1.2
NetR13_2: R13.2 U3.12 | length 11.5
  Top Layer w0.2: R13.2 -6.125,52.225 -4.5,53.85 U3.12
NetR14_1: R14.1 U1.16 | length 14.5
  Top Layer w0.2: R14.1 -3.925,32.225 -2.975,31.275 -1.65,31.275 U1.16
NetR14_2: R14.2 U3.13 | length 8.8
  Top Layer w0.2: R14.2 -3.925,48.15 -1.4,50.675 U3.13
NetR15_1: R15.1 U1.1 | length 14.4
  Top Layer w0.2: v2(-2.8,30.375) -2.05,29.625 U1.1 ; v2(-1.85,40.125) R15.1@-1.85,42.85
  Bottom Layer w0.2: v2(-2.8,30.375) -2.8,39.175 v2(-1.85,40.125)
NetR15_2: R15.2 U3.14 | length 8
  Top Layer w0.2: R15.2 -1.775,48.075 -0.9,48.95 U3.14
NetR16_1: R16.1 U1.15 | length 16.1
  Top Layer w0.2: U1.15 -0.275,30.925 -1.225,31.875 -2.55,31.875 -3.275,32.6 -3.275,37.525 0.475,41.275 R16.1
NetR16_2: R16.2 U3.15 | length 8
  Top Layer w0.2: U3.15 -0.4,47.7 0.475,46.825 R16.2
NetR17_1: R17.1 U1.14 | length 16.3
  Top Layer w0.2: U1.14 0.225,31.05 -1.225,32.5 -2.15,32.5 -2.525,32.875 -2.525,36.525 2.825,41.875 R17.1
NetR17_2: R17.2 U3.18 | length 8.4
  Top Layer w0.2: U3.18 1.1,46.35 R17.2
NetR18_2: R18.2 U3.19 | length 9.5
  Top Layer w0.2: U3.19 1.6,47.65 3.025,46.225 3.675,46.225 R18.2
NetR19_2: R19.2 U3.46 | length 5.8
  Top Layer w0.2: R19.2@-0.525,66.4 R19.2 -0.6,63.1 -0.4,62.9 U3.46
NetR20_1: R20.1 U3.43 | length 19.6
  Top Layer w0.2: R20.1 -10.2,61.375 -9.825,61.75 -4.8,61.75 -3.45,60.4 -2.65,60.4 -1.725,59.475 1.1,59.475 U3.43
nRST: J1.10 U3.7 | length 20.1
  Top Layer w0.2: U3.7 1.2,56.35 6.025,61.175 v2(6.3,61.175) ; v2(8.8,63.525) 11.75,63.525 12.535,64.31 J1.10
  Bottom Layer w0.2: v2(6.3,61.175) 8.65,63.525 v2(8.8,63.525)
SWCLK: J1.4 U3.37 | length 15.5
  Top Layer w0.2: U3.37 4.1,61.7 4.475,62.075 14.1,62.075 16.345,64.32 J1.4
SWDIO: J1.2 U3.34 | length 25.2
  Top Layer w0.2: U3.34 6.85,58.35 7.55,57.65 7.55,54.4 8.675,53.275 12.175,53.275 17.425,58.525 17.425,65.45 J1.2
SWO: J1.6 U3.39 | length 14.5
  Top Layer w0.2: U3.39 3.1,61.85 3.95,62.7 12.135,62.7 J1.6
VBATT: C1_1.2 C1_2.2 C5.2 C14.2 H1_1.5 H1_2.5 H2.1 H3.+ U1.6 U2.1 U2.3 | length 138
  Top Layer w0.2: -27.75,42.225 H1_1.5 -27.75,46.2 -28.95,47.4 -28.95,55.05 -27.6,56.4 C1_1.2 -25.85,59.025 C14.2 ; C14.2@-23.635,61.76 H2.1 ; -0.275,25.425 U1.6 ; 7.975,36.825 8,36.8 C5.2 ; C5.2@8,35.725 U2.1 ; U2.3 11.3,33.825 11.6,34.125 11.6,35.35 11.225,35.725 U2.1 ; H1_2.5 24.625,39.65 24.425,39.45 11.575,39.45 10.15,38.025 U2.1
  Top Layer w0.3: 7.975,36.825 8.3,37.15 8.3,37.425
  Top Layer w0.4: -27.75,42.225 -27.175,41.65
  Top Layer w0.5: -27.175,41.65 -26.5,40.975 ; -0.275,24.05 -0.275,25.425 ; 8.3,37.425 8.3,38.175
  Top Layer w0.6: -26.5,40.975 -26.025,40.5 v2@-25.125,40.5
  Top Layer w0.7: v2@-25.125,40.5 -25.075,40.55 v2(-24.65,40.55)
  Top Layer w0.8: v2(-0.275,23) -0.275,24.05 ; v2(6.85,38.55) 7.925,38.55 8.3,38.175
  Bottom Layer w0.8: v2@-24.625,40.575 -15.675,40.575 -12.45,43.8 1.575,43.8 5.6,39.775 5.6,38.55 ; H3.+@-1.032,8.423 -1.032,20.118 5.6,26.75 5.6,38.55 ; v2(-0.275,23) 0.763,21.962 ; v2(6.85,38.55) 5.6,38.55
pads on no net: H1_1. H1_2. J1.7 J1.8 M1_1.21 M1_1.22 M1_2.21 M1_2.22 U2.4 U3.2 U3.3 U3.4 U3.5 U3.6 U3.21 U3.22 U3.25 U3.26 U3.27 U3.28 U3.29 U3.30 U3.31 U3.32 U3.33 U3.38 U3.40 U3.41

## Polygon pours and split planes (outlines as drawn)
GND on Bottom Layer "Top Layer-No Net" (solid, remove dead copper, pour order 4): -53.75,84.975 50.425,84.975 50.6,84.8 49.975,84.175 49.975,38.6 33.4,38.6 33.125,38.875 33.65,38.35 33.65,-1.975 -32.8,-1.975 -33.15,-1.625 -33.7,-1.075 -33.7,38.325 -54.75,38.325 -54.925,38.15
GND on Top Layer "Top Layer-No Net" (solid, remove dead copper, pour order 6): -31.825,0.325 -31.725,0.425 -31.725,39.675 -45.825,39.675 -46,39.5 -45.825,39.675 -45.825,85.775 45.7,85.775 46.225,85.25 46.325,85.15 46.325,39.5 32.4,39.5 31.875,38.975 31.875,0.075

## Keep-outs
Keep-Out Layer:
  lines w0.1: 44.999,42.141 ccw(c44.949,42.141) 44.999,42.142 ; -45.05,40.001 ccw(c-45,40) -45,39.95 ; -45.05,40.002 ccw(c-45,40) -45,39.95 ; -45.05,40.002 -44.999,42.142 ; -45.05,40.001 -45.05,40.002 ; -45,39.95 -31.55,39.95 -31.55,0 ; -44.999,42.142 cw(c-44.949,42.141) -44.999,42.145 ; -44.999,42.142 cw(c-44.949,42.141) -44.999,42.145 ; -44.999,42.142 -44.999,42.142 ; -44.999,42.145 -44.846,44.281 ; -44.846,44.281 cw(c-44.796,44.278) -44.846,44.283 ; -44.846,44.281 cw(c-44.796,44.278) -44.846,44.283 ; -44.846,44.283 -44.592,46.41 ; -44.592,46.41 cw(c-44.542,46.404) -44.591,46.413 ; -44.592,46.41 cw(c-44.542,46.404) -44.591,46.412 ; -44.591,46.413 -44.236,48.524 ; -44.591,46.412 -44.591,46.413 ; -44.236,48.525 cw(c-44.187,48.516) -44.236,48.527 ; -44.236,48.524 cw(c-44.187,48.516) -44.236,48.527 ; -44.236,48.524 -44.236,48.525 ; -44.236,48.527 ccw(c-44.187,48.516) -44.236,48.527 ; -44.236,48.527 -43.78,50.62 ; -44.236,48.527 -44.236,48.527 ; -44.236,48.527 -44.236,48.527 ; -43.78,50.62 cw(c-43.732,50.609) -43.78,50.622 ; -43.78,50.62 ccw(c-43.732,50.609) -43.78,50.62 ; -43.78,50.62 cw(c-43.732,50.609) -43.78,50.622 ; -43.78,50.62 -43.78,50.62 ; -43.78,50.62 -43.78,50.62 ; -43.78,50.622 ccw(c-43.732,50.609) -43.78,50.622 ; -43.78,50.622 -43.226,52.691 ; -43.78,50.622 -43.78,50.622 ; -43.78,50.622 -43.78,50.622 ; -43.226,52.691 cw(c-43.177,52.678) -43.225,52.693 ; -43.226,52.691 ccw(c-43.177,52.678) -43.226,52.691 ; -43.226,52.691 cw(c-43.177,52.678) -43.225,52.693 ; -43.226,52.691 -43.226,52.691 ; -43.226,52.691 -43.226,52.691 ; -43.225,52.693 -42.573,54.733 ; -42.573,54.733 cw(c-42.525,54.718) -42.572,54.735 ; -42.573,54.733 cw(c-42.525,54.718) -42.572,54.736 ; -42.572,54.736 ccw(c-42.525,54.718) -42.572,54.735 ; -42.572,54.736 -41.824,56.742 ; -42.572,54.736 -42.572,54.736 ; -42.572,54.735 -42.572,54.736 ; -41.823,56.742 cw(c-41.777,56.725) -41.823,56.744 ; -41.823,56.742 ccw(c-41.777,56.725) -41.823,56.742 ; -41.823,56.742 cw(c-41.777,56.725) -41.823,56.744 ; -41.823,56.742 -41.823,56.742 ; -41.824,56.742 -41.823,56.742 ; -41.823,56.744 -40.979,58.713 ; -40.979,58.713 cw(c-40.933,58.694) -40.979,58.715 ; -40.979,58.713 cw(c-40.933,58.694) -40.978,58.716 ; -40.979,58.715 cw(c-40.933,58.694) -40.978,58.716 ; -40.979,58.715 -40.978,58.716 ; -40.978,58.716 -40.043,60.642 ; -40.978,58.716 -40.978,58.716 ; -40.043,60.642 cw(c-39.998,60.62) -40.042,60.644 ; -40.043,60.642 cw(c-39.998,60.62) -40.043,60.642 ; -40.043,60.642 -40.043,60.642 ; -40.043,60.642 -40.043,60.642 ; -40.043,60.642 cw(c-39.998,60.62) -40.042,60.644 ; -40.042,60.644 -39.015,62.524 ; -39.015,62.524 cw(c-38.971,62.5) -39.014,62.526 ; -39.015,62.524 cw(c-38.971,62.5) -39.014,62.526 ; -39.014,62.526 -37.899,64.355 ; -37.899,64.355 cw(c-37.856,64.329) -37.898,64.357 ; -37.899,64.355 cw(c-37.856,64.329) -37.898,64.357 ; -37.898,64.357 -36.698,66.13 ; -37.898,64.357 -37.898,64.357 ; -36.697,66.131 cw(c-36.656,66.103) -36.696,66.133 ; -36.698,66.13 cw(c-36.656,66.103) -36.696,66.133 ; -36.698,66.13 -36.697,66.131 ; -36.696,66.133 -35.412,67.847 ; -35.412,67.847 cw(c-35.372,67.817) -35.411,67.849 ; -35.412,67.847 cw(c-35.372,67.817) -35.411,67.849 ; -35.411,67.849 -34.047,69.501 ; -34.047,69.501 cw(c-34.009,69.469) -34.046,69.502 ; -34.047,69.501 cw(c-34.009,69.469) -34.046,69.502 ; -34.046,69.503 ccw(c-34.009,69.469) -34.046,69.502 ; -34.046,69.503 -32.605,71.087 ; -34.046,69.502 -34.046,69.503 ; -34.046,69.502 -34.046,69.502 ; -32.605,71.087 cw(c-32.568,71.054) -32.603,71.089 ; -32.605,71.087 ccw(c-32.568,71.054) -32.605,71.087 ; -32.605,71.087 cw(c-32.568,71.054) -32.603,71.089 ; -32.605,71.087 -32.605,71.087 ; -32.605,71.087 -32.605,71.087 ; -32.603,71.089 -31.089,72.603 ; -31.55,0 ccw(c-31.5,0) -31.5,-0.05 ; -31.55,0 ccw(c-31.5,0) -31.5,-0.05 ; -31.5,-0.05 31.5,-0.05 ; -31.089,72.603 cw(c-31.054,72.568) -31.087,72.605 ; -31.089,72.603 cw(c-31.054,72.568) -31.087,72.605 ; -31.087,72.605 ccw(c-31.054,72.568) -31.087,72.605 ; -31.087,72.605 -29.503,74.046 ; -31.087,72.605 -31.087,72.605 ; -31.087,72.605 -31.087,72.605 ; -29.503,74.046 cw(c-29.469,74.009) -29.502,74.046 ; -29.503,74.046 -29.502,74.046 ; -29.502,74.046 cw(c-29.469,74.009) -29.501,74.047 ; -29.502,74.046 cw(c-29.469,74.009) -29.501,74.047 ; -29.502,74.046 -29.502,74.046 ; -29.501,74.047 -27.849,75.411 ; -27.849,75.411 cw(c-27.817,75.372) -27.847,75.412 ; -27.849,75.411 cw(c-27.817,75.372) -27.847,75.412 ; -27.847,75.412 -26.133,76.696 ; -26.133,76.696 cw(c-26.103,76.656) -26.13,76.698 ; -26.133,76.696 cw(c-26.103,76.656) -26.131,76.697 -26.13,76.698 ; -26.13,76.698 -24.357,77.898 ; -24.357,77.898 cw(c-24.329,77.856) -24.355,77.899 ; -24.357,77.898 cw(c-24.329,77.856) -24.355,77.899 ; -24.357,77.898 -24.357,77.898 ; -24.355,77.899 -22.526,79.014 ; -22.526,79.014 cw(c-22.5,78.971) -22.524,79.015 ; -22.526,79.014 cw(c-22.5,78.971) -22.524,79.015 ; -22.524,79.015 -20.644,80.041 ; -20.644,80.041 cw(c-20.62,79.998) -20.642,80.042 ; -20.644,80.041 cw(c-20.62,79.998) -20.642,80.043 ; -20.642,80.042 cw(c-20.62,79.998) -20.642,80.043 ; -20.642,80.043 -20.642,80.043 ; -20.642,80.042 -20.642,80.043 ; -20.642,80.043 -18.716,80.978 ; -18.716,80.978 cw(c-18.694,80.933) -18.713,80.979 ; -18.715,80.979 ccw(c-18.694,80.933) -18.716,80.978 ; -18.715,80.979 cw(c-18.694,80.933) -18.713,80.979 ; -18.716,80.978 -18.715,80.979 ; -18.716,80.978 -18.716,80.978 ; -18.713,80.979 -16.745,81.823 ; -16.745,81.823 cw(c-16.725,81.777) -16.742,81.823 ; -16.745,81.823 cw(c-16.725,81.777) -16.742,81.823 ; -16.742,81.823 cw(c-16.725,81.777) -16.742,81.823 ; -16.742,81.823 -16.742,81.823 ; -16.742,81.823 -16.742,81.823 ; -16.742,81.823 -14.736,82.572 ; -14.736,82.572 cw(c-14.718,82.525) -14.735,82.572 ; -14.736,82.572 -14.736,82.572 ; -14.736,82.572 cw(c-14.718,82.525) -14.733,82.573 ; -14.735,82.572 cw(c-14.718,82.525) -14.733,82.573 ; -14.736,82.572 -14.735,82.572 ; -14.733,82.573 -12.693,83.225 ; -12.693,83.225 cw(c-12.678,83.177) -12.691,83.225 ; -12.693,83.225 cw(c-12.678,83.177) -12.691,83.226 ; -12.691,83.225 cw(c-12.678,83.177) -12.691,83.226 ; -12.691,83.225 -12.691,83.226 ; -12.691,83.226 -10.622,83.78 ; -12.691,83.226 -12.691,83.226 ; -10.622,83.78 cw(c-10.609,83.732) -10.622,83.78 ; -10.622,83.78 -10.622,83.78 ; -10.622,83.78 cw(c-10.609,83.732) -10.62,83.78 ; -10.622,83.78 cw(c-10.609,83.732) -10.62,83.78 ; -10.622,83.78 -10.622,83.78 ; -10.62,83.78 -8.527,84.236 ; -8.527,84.236 cw(c-8.516,84.187) -8.524,84.236 ; -8.527,84.236 cw(c-8.516,84.187) -8.525,84.236 -8.524,84.236 ; -8.524,84.236 -6.413,84.591 ; -6.412,84.591 cw(c-6.404,84.542) -6.41,84.592 ; -6.413,84.591 cw(c-6.404,84.542) -6.41,84.592 ; -6.413,84.591 -6.412,84.591 ; -6.41,84.592 -4.283,84.846 ; -4.283,84.846 cw(c-4.278,84.796) -4.281,84.846 ; -4.283,84.846 cw(c-4.278,84.796) -4.281,84.846 ; -4.281,84.846 -2.145,84.999 ; -2.145,84.999 cw(c-2.141,84.949) -2.142,84.999 ; -2.145,84.999 cw(c-2.141,84.949) -2.142,84.999 -2.142,84.999 ; -2.142,84.999 -0.002,85.05 ; -0.001,85.05 cw(c0,85) 0.002,85.05 ; -0.002,85.05 cw(c0,85) 0.001,85.05 0.002,85.05 ; -0.002,85.05 -0.001,85.05 ; 0.002,85.05 2.142,84.999 ; 2.142,84.999 cw(c2.141,84.949) 2.145,84.999 ; 2.142,84.999 cw(c2.141,84.949) 2.145,84.999 ; 2.142,84.999 2.142,84.999 ; 2.145,84.999 4.281,84.846 ; 4.281,84.846 cw(c4.278,84.796) 4.283,84.846 ; 4.281,84.846 cw(c4.278,84.796) 4.283,84.846 ; 4.283,84.846 6.41,84.592 ; 6.41,84.592 cw(c6.404,84.542) 6.413,84.591 ; 6.41,84.592 cw(c6.404,84.542) 6.412,84.591 ; 6.413,84.591 8.524,84.236 ; 6.412,84.591 6.413,84.591 ; 8.524,84.236 cw(c8.516,84.187) 8.527,84.236 ; 8.524,84.236 8.525,84.236 cw(c8.516,84.187) 8.527,84.236 ; 8.527,84.236 cw(c8.516,84.187) 8.527,84.236 ; 8.527,84.236 8.527,84.236 ; 8.527,84.236 10.62,83.78 ; 8.527,84.236 8.527,84.236 ; 10.62,83.78 cw(c10.609,83.732) 10.622,83.78 ; 10.62,83.78 ccw(c10.609,83.732) 10.62,83.78 ; 10.62,83.78 cw(c10.609,83.732) 10.622,83.78 ; 10.62,83.78 10.62,83.78 ; 10.62,83.78 10.62,83.78 ; 10.622,83.78 ccw(c10.609,83.732) 10.622,83.78 ; 10.622,83.78 12.691,83.226 ; 10.622,83.78 10.622,83.78 ; 10.622,83.78 10.622,83.78 ; 12.691,83.226 cw(c12.678,83.177) 12.693,83.225 ; 12.691,83.225 ccw(c12.678,83.177) 12.691,83.226 ; 12.691,83.225 cw(c12.678,83.177) 12.693,83.225 ; 12.691,83.226 12.691,83.225 ; 12.691,83.226 12.691,83.226 ; 12.693,83.225 14.733,82.573 ; 14.733,82.573 cw(c14.718,82.525) 14.735,82.572 ; 14.733,82.573 cw(c14.718,82.525) 14.736,82.572 ; 14.736,82.572 ccw(c14.718,82.525) 14.735,82.572 ; 14.736,82.572 16.742,81.823 ; 14.736,82.572 14.736,82.572 ; 14.735,82.572 14.736,82.572 ; 16.742,81.823 cw(c16.725,81.777) 16.744,81.823 ; 16.742,81.823 ccw(c16.725,81.777) 16.742,81.823 ; 16.742,81.823 cw(c16.725,81.777) 16.744,81.823 ; 16.742,81.823 16.742,81.823 ; 16.742,81.823 16.742,81.823 ; 16.744,81.823 18.713,80.979 ; 18.713,80.979 cw(c18.694,80.933) 18.715,80.979 ; 18.713,80.979 cw(c18.694,80.933) 18.716,80.978 ; 18.716,80.978 ccw(c18.694,80.933) 18.715,80.979 ; 18.716,80.978 20.642,80.043 ; 18.716,80.978 18.716,80.978 ; 18.715,80.979 18.716,80.978 ; 20.642,80.042 ccw(c20.62,79.998) 20.642,80.043 ; 20.642,80.042 cw(c20.62,79.998) 20.644,80.042 ; 20.642,80.042 20.642,80.043 ; 20.642,80.043 cw(c20.62,79.998) 20.644,80.042 ; 20.642,80.043 20.642,80.043 ; 20.644,80.042 22.524,79.015 ; 22.524,79.015 cw(c22.5,78.971) 22.526,79.014 ; 22.524,79.015 cw(c22.5,78.971) 22.526,79.014 ; 22.526,79.014 24.355,77.899 ; 24.355,77.899 cw(c24.329,77.856) 24.357,77.898 ; 24.355,77.899 cw(c24.329,77.856) 24.357,77.898 ; 24.357,77.898 26.13,76.698 ; 24.357,77.898 24.357,77.898 ; 26.13,76.698 cw(c26.103,76.656) 26.133,76.696 ; 26.13,76.698 26.131,76.697 cw(c26.103,76.656) 26.133,76.696 ; 26.133,76.696 27.847,75.412 ; 27.847,75.412 cw(c27.817,75.372) 27.849,75.411 ; 27.847,75.412 cw(c27.817,75.372) 27.849,75.411 ; 27.849,75.411 29.501,74.047 ; 29.501,74.047 cw(c29.469,74.009) 29.502,74.046 ; 29.501,74.047 cw(c29.469,74.009) 29.502,74.046 ; 29.502,74.046 cw(c29.469,74.009) 29.503,74.046 ; 29.502,74.046 29.502,74.046 ; 29.503,74.046 31.087,72.605 ; 29.503,74.046 29.502,74.046 ; 31.087,72.605 cw(c31.054,72.568) 31.087,72.605 ; 31.087,72.605 31.087,72.605 ; 31.087,72.605 cw(c31.054,72.568) 31.089,72.603 ; 31.087,72.605 cw(c31.054,72.568) 31.089,72.603 ; 31.087,72.605 31.087,72.605 ; 31.089,72.603 32.603,71.089 ; 31.5,-0.05 ccw(c31.5,0) 31.55,0 ; 31.5,-0.05 ccw(c31.5,0) 31.55,0 ; 31.55,0 31.55,39.95 45,39.95 ; 32.603,71.089 cw(c32.568,71.054) 32.605,71.087 ; 32.603,71.089 cw(c32.568,71.054) 32.605,71.087 ; 32.605,71.087 ccw(c32.568,71.054) 32.605,71.087 ; 32.605,71.087 32.605,71.087 ; 32.605,71.087 32.605,71.087 ; 32.605,71.087 34.046,69.503 ; 34.046,69.502 cw(c34.009,69.469) 34.047,69.501 ; 34.046,69.502 ccw(c34.009,69.469) 34.046,69.503 ; 34.046,69.502 cw(c34.009,69.469) 34.047,69.501 ; 34.046,69.503 34.046,69.502 ; 34.046,69.502 34.046,69.502 ; 34.047,69.501 35.411,67.849 ; 35.411,67.849 cw(c35.372,67.817) 35.412,67.847 ; 35.411,67.849 cw(c35.372,67.817) 35.412,67.847 ; 35.412,67.847 36.696,66.133 ; 36.696,66.133 cw(c36.656,66.103) 36.698,66.13 ; 36.696,66.133 cw(c36.656,66.103) 36.697,66.131 ; 36.697,66.131 36.698,66.13 ; 36.698,66.13 37.898,64.357 ; 37.898,64.357 cw(c37.856,64.329) 37.899,64.355 ; 37.898,64.357 cw(c37.856,64.329) 37.899,64.355 ; 37.898,64.357 37.898,64.357 ; 37.899,64.355 39.014,62.526 ; 39.014,62.526 cw(c38.971,62.5) 39.015,62.524 ; 39.014,62.526 cw(c38.971,62.5) 39.015,62.524 ; 39.015,62.524 40.041,60.644 ; 40.041,60.644 cw(c39.998,60.62) 40.042,60.642 ; 40.041,60.644 cw(c39.998,60.62) 40.043,60.642 ; 40.043,60.642 ccw(c39.998,60.62) 40.042,60.642 ; 40.043,60.642 40.042,60.642 ; 40.043,60.642 40.043,60.642 ; 40.043,60.642 40.978,58.716 ; 40.979,58.715 ccw(c40.933,58.694) 40.978,58.716 ; 40.979,58.715 cw(c40.933,58.694) 40.979,58.713 ; 40.979,58.715 40.978,58.716 ; 40.978,58.716 cw(c40.933,58.694) 40.979,58.713 ; 40.978,58.716 40.978,58.716 ; 40.979,58.713 41.823,56.745 ; 41.823,56.742 ccw(c41.777,56.725) 41.823,56.745 ; 41.823,56.742 ccw(c41.777,56.725) 41.823,56.742 ; 41.823,56.742 ccw(c41.777,56.725) 41.823,56.745 ; 41.823,56.742 41.823,56.742 ; 41.823,56.742 41.823,56.742 ; 41.823,56.742 42.572,54.736 ; 42.573,54.733 ccw(c42.525,54.718) 42.572,54.736 ; 42.573,54.733 ccw(c42.525,54.718) 42.572,54.735 ; 42.573,54.733 43.225,52.693 ; 42.572,54.735 ccw(c42.525,54.718) 42.572,54.736 ; 42.572,54.736 42.572,54.736 ; 42.572,54.736 42.572,54.735 ; 43.225,52.691 ccw(c43.177,52.678) 43.225,52.693 ; 43.226,52.691 ccw(c43.177,52.678) 43.225,52.691 ; 43.226,52.691 ccw(c43.177,52.678) 43.225,52.693 ; 43.225,52.691 43.226,52.691 ; 43.226,52.691 43.226,52.691 ; 43.226,52.691 43.78,50.622 ; 43.78,50.62 ccw(c43.732,50.609) 43.78,50.622 ; 43.78,50.62 ccw(c43.732,50.609) 43.78,50.62 ; 43.78,50.62 ccw(c43.732,50.609) 43.78,50.622 ; 43.78,50.62 43.78,50.62 ; 43.78,50.62 43.78,50.62 ; 43.78,50.62 44.236,48.527 ; 43.78,50.622 ccw(c43.732,50.609) 43.78,50.622 ; 43.78,50.622 43.78,50.622 ; 43.78,50.622 43.78,50.622 ; 44.236,48.524 ccw(c44.187,48.516) 44.236,48.527 ; 44.236,48.525 ccw(c44.187,48.516) 44.236,48.527 ; 44.236,48.525 44.236,48.524 ; 44.236,48.524 44.591,46.413 ; 44.236,48.527 ccw(c44.187,48.516) 44.236,48.527 ; 44.236,48.527 44.236,48.527 ; 44.236,48.527 44.236,48.527 ; 44.592,46.41 ccw(c44.542,46.404) 44.591,46.412 ; 44.592,46.41 ccw(c44.542,46.404) 44.591,46.413 ; 44.592,46.41 44.846,44.283 ; 44.591,46.413 44.591,46.412 ; 44.846,44.281 ccw(c44.796,44.278) 44.846,44.283 ; 44.846,44.281 ccw(c44.796,44.278) 44.846,44.283 ; 44.846,44.281 44.999,42.145 ; 45,39.95 ccw(c45,40) 45.05,40 ; 45,39.95 ccw(c45,40) 45.05,40 ; 44.999,42.142 ccw(c44.949,42.141) 44.999,42.145 ; 44.999,42.142 ccw(c44.949,42.141) 44.999,42.145 ; 44.999,42.142 44.999,42.142 ; 44.999,42.142 45.05,40.002 ; 45.05,40 ccw(c45,40) 45.05,40.001 ; 45.05,40 ccw(c45,40) 45.05,40.002 ; 45.05,40.002 45.05,40.001

## Silkscreen, mask and mechanical layers (free items; w line width, h text height)
Mechanical 1:
  drawing of 350 lines, arcs and shapes, not listed